# Allegro board MOTOR_SENSOR_wangwang.brd
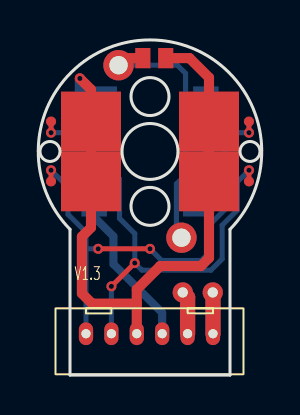
[diagram p0: board, top side]
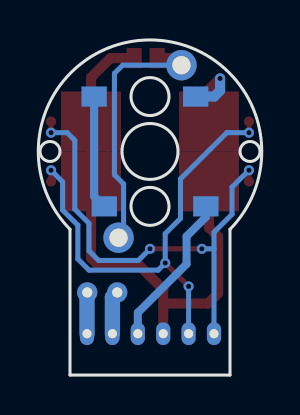
[diagram p1: board, bottom side, seen from below]

Outline 11 x 16.79 mm; copper layers: TOP, BOTTOM. Coordinates in mm from the lower left corner of the outline.
Outline path: circle c0.5,11.2 r0.5 ; circle c5.5,11.2 r1.4 ; circle c10.5,11.2 r0.5 ; 1.5,7.3 arc(5.5,16.79) 9.5,7.3 9.5,0 1.5,0 1.5,7.3

## Placement (name value [footprint] x y rotation side)
D1  -  [TSMF1000]  5.5 8.45 180 bottom
D2  -  [TSMF1000]  5.5 13.95 0 bottom
J1  TO_MOTOR  [SIP6_1D27Z]  2.3 2.07 0 top
J2  CON2  [SIP2_SMALL]  7.89 4.14 270 top
J3  CON1  [SIP1_D1MM]  7.07 6.88 0 top
J4  CON1  [SIP1_D1MM]  3.93 15.52 0 top
J5  CON1  [PAD_40_30]  5.14 15.87 90 top
J6  CON1  [PAD_40_30]  6.29 15.87 90 top
P1  LEFTUP  [SIPHO3_3MM]  2.55 12.7 0 top
P2  LEFTDOWN  [SIPHO3_3MM]  2.55 9.7 0 top
P3  RIGHTUP  [SIPHO3_3MM]  8.45 12.7 180 top
P4  RIGHTDOWN  [SIPHO3_3MM]  8.45 9.7 180 top

## Library data of the parts
D1 D2 = LED
J1 = CON6: User Part Number: ***
J2 = CON2
J3-J6 = CON1
P1-P4 = PHOTODIODE

## Footprints (pads in the part's own frame, mm; a bottom-side part is the same pattern mirrored in y, then rotated)
PAD_40_30
  rect 1.016x0.762 smd: 1(0,0)
SIP1_D1MM
  round 1.524 hole 0.914: 1(0,0)
SIP2_SMALL
  round 1.016 hole 0.508: 1(0,0.75) 2(0,-0.75)
SIP6_1D27Z
  oval 0.711x1.143 hole 0.457: 1(0,0) 2(1.27,0) 3(2.54,0) 4(3.81,0) 5(5.08,0) 6(6.35,0)
SIPHO3_3MM
  rect 3x3 smd: 1(0,0)
  round 0.508 smd: 2(-1.998,0)
TSMF1000
  rect 1.27x1.016 smd: 1(-2.286,0) 2(2.794,0)

## Nets
GND: D2.1(CATHODE) J1.3 J6.1 P1.1(CATHODE) P2.1(CATHODE) P3.1(CATHODE) P4.1(CATHODE)
LED_POS: D1.2(ANODE) J1.4
M_DRV1: J1.5 J2.2
M_DRV2: J1.6 J2.1
M_POS1: J1.2 P1.2(ANODE) P4.2(ANODE)
M_POS2: J1.1 P2.2(ANODE) P3.2(ANODE)
N137308: D1.1(CATHODE) D2.2(ANODE)
N139039: J3.1 J4.1 J5.1

## Via types
v1: diameter 0.508, hole 0.254, TOP to BOTTOM, 9 vias

## Routing (per net, layer and track width the routed paths; a pad name or vN(x,y) marks a point on that pad's centre or on a via; arc(x,y) is an arc through that point)
GND: length 34.2
  TOP w0.508: 4.84,3.58 4.84,4.29 6.01,5.46 8.04,5.46 8.45,5.87 P4.1 P3.1 8.45,14.9 7.48,15.87 J6.1 ; 4.84,3.58 J1.3 ; 4.84,3.58 2.6,3.58 2.1,4.09 2.1,6.93 2.55,7.39 P2.1 P1.1 2.55,14.3 v1(1.99,14.86)
  BOTTOM w0.508: v1(1.99,14.86) 1.99,14.25 2.29,13.95 D2.1
LED_POS: length 7.8
  BOTTOM w0.4: D1.2 2.71,7.91 3.67,6.95 3.67,5.56 6.11,3.12 J1.4
M_DRV1: length 4.3
  TOP w0.762: J1.5 7.38,3.9 J2.2
  BOTTOM w0.762: J1.5 7.38,3.9 J2.2
M_DRV2: length 4.1
  TOP w0.762: J2.1 8.65,4.13 J1.6
  BOTTOM w0.762: J1.6 8.65,4.13 J2.1
M_POS1: length 23.8
  TOP w0.254: v1(3.57,4.44) v1(4.74,5.61) ; P4.2 v1(10.45,10.26) ; v1(0.55,12.14) P1.2
  BOTTOM w0.254: v1(0.55,12.14) 1.66,12.14 3.98,9.82 3.98,7.85 4.74,7.09 v1(4.74,5.61) 5.09,5.26 8.55,5.26 9.11,5.82 9.11,7.5 9.87,8.27 9.87,9.68 v1(10.45,10.26) ; v1(3.57,4.44) J1.2
M_POS2: length 23.9
  TOP w0.254: P2.2 v1(0.55,10.26) ; P3.2 v1(10.45,12.14) ; v1(5.5,6.32) v1(2.91,6.32)
  BOTTOM w0.254: v1(5.5,6.32) 6.08,5.74 8.07,5.74 8.55,6.22 8.55,7.6 9.26,8.31 9.26,11.76 9.64,12.14 v1(10.45,12.14) ; v1(0.55,10.26) 1.4,9.41 1.4,8.05 2.3,7.15 2.3,6.32 ; v1(2.91,6.32) 2.3,6.32 ; 2.3,6.32 J1.1
N137308: length 5.7
  BOTTOM w0.406: D1.1 8.29,8.96 D2.2
N139039: length 13.4
  TOP w0.508: J5.1 4.28,15.87 J4.1
  BOTTOM w0.254: J3.1 6.82,7.13 6.82,9.57 7.28,10.03 7.28,15.11 6.87,15.52 J4.1

## Text on the board
Ref Des/Silkscreen Top: V1.3
USER_PART_NUM_TOP: FIGURE | SIZE | 0.254 | 0.4572 | 0.508 | 0.9144 | DRILL CHART: TOP to BOTTOM | ALL UNITS ARE IN MILLIMETERS | PLATED | QTY | 9 | 6 | 2
